# Altium PCB Layout.PcbDoc
Units mm, origin at the board's own origin, x right, y up, seen from the top; angles counter-clockwise.
Board outline 79.2 x 46 mm, 2 copper layers (Top Layer, Bottom Layer); 50 components, 65 nets, 209 pads, 9 vias.
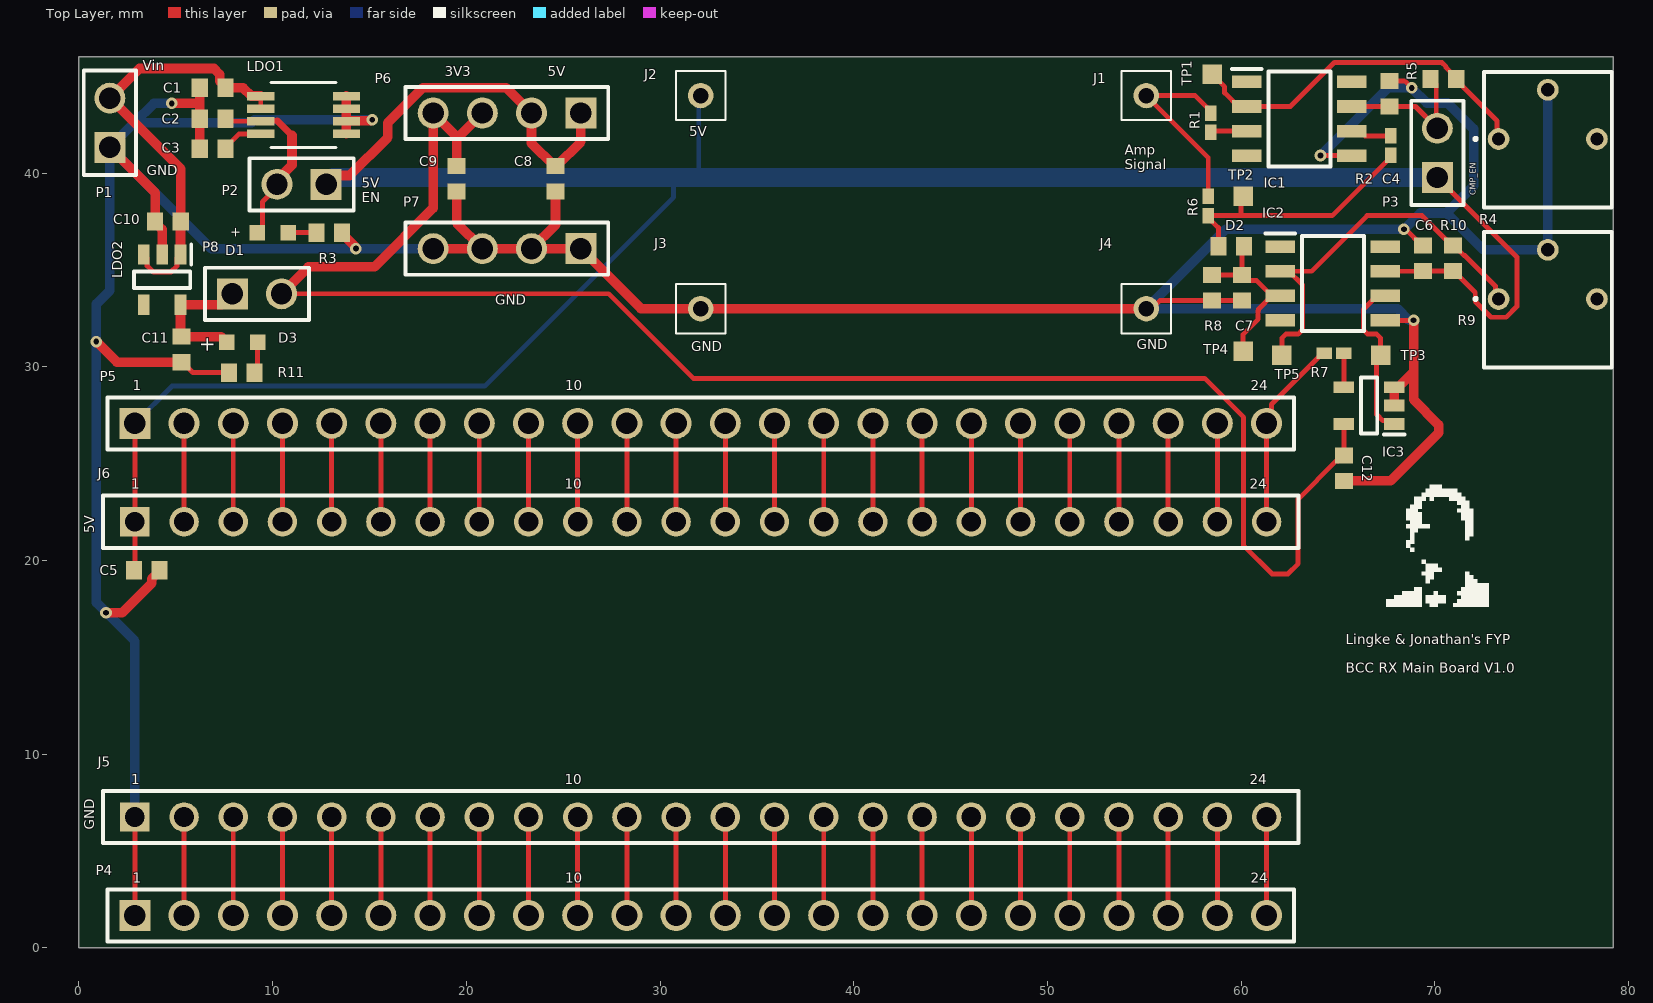
[diagram p0: Top Layer view]
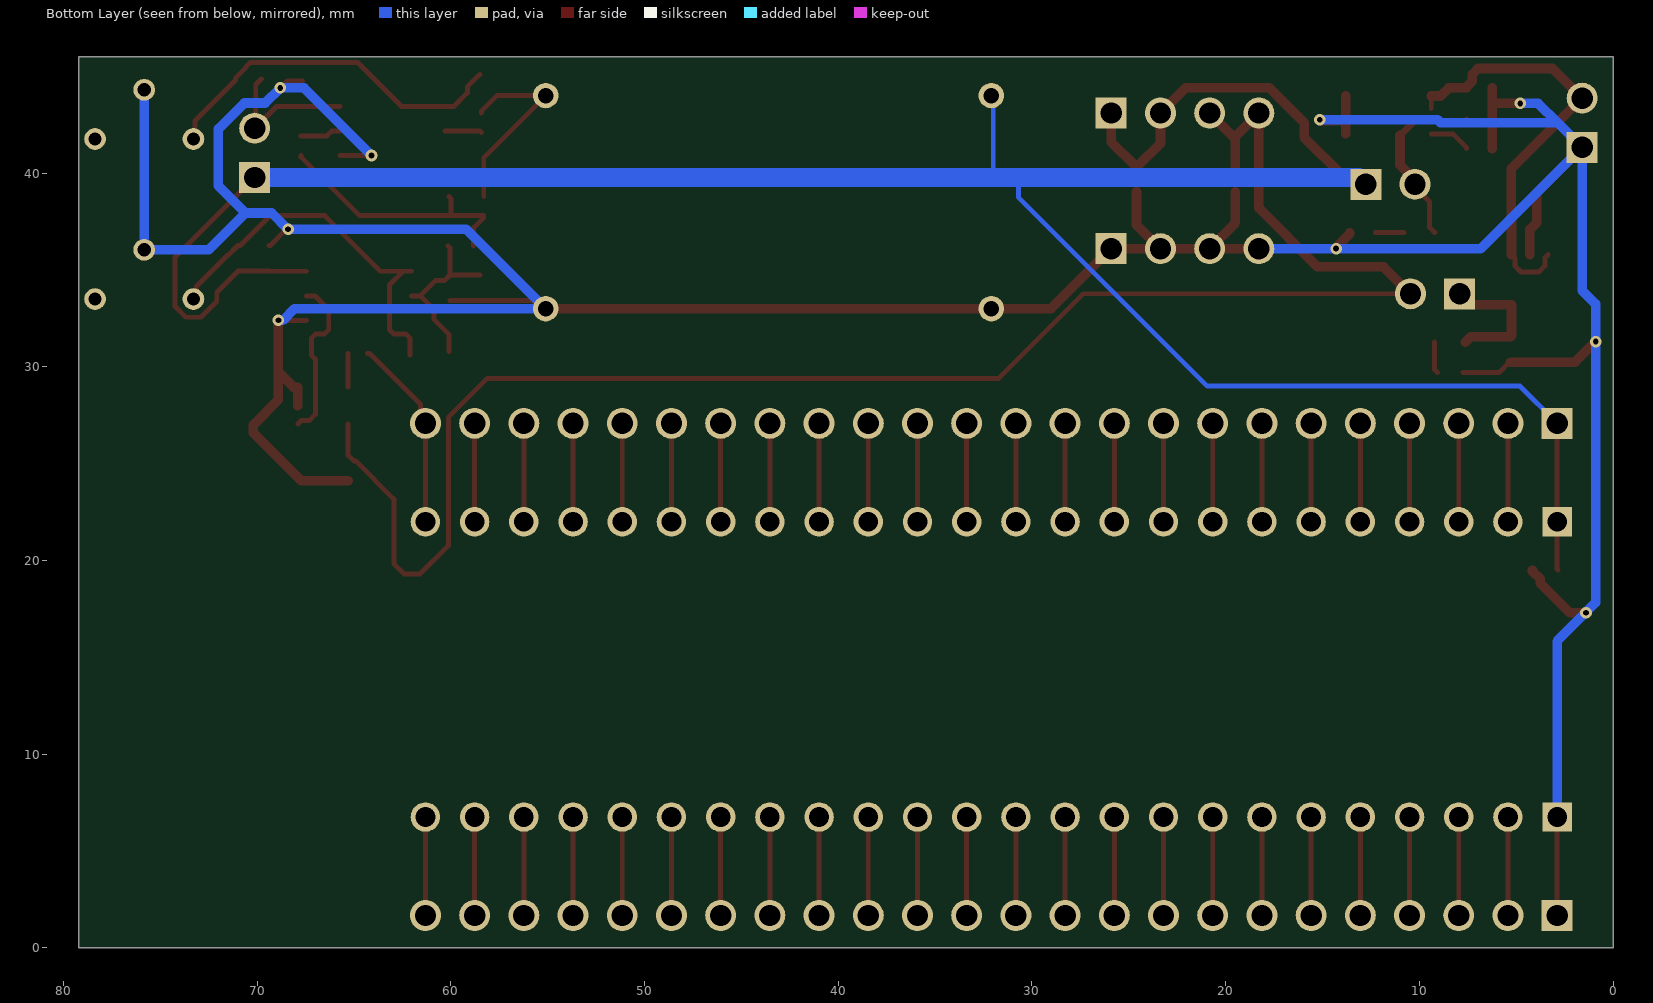
[diagram p1: Bottom Layer view, seen from below]
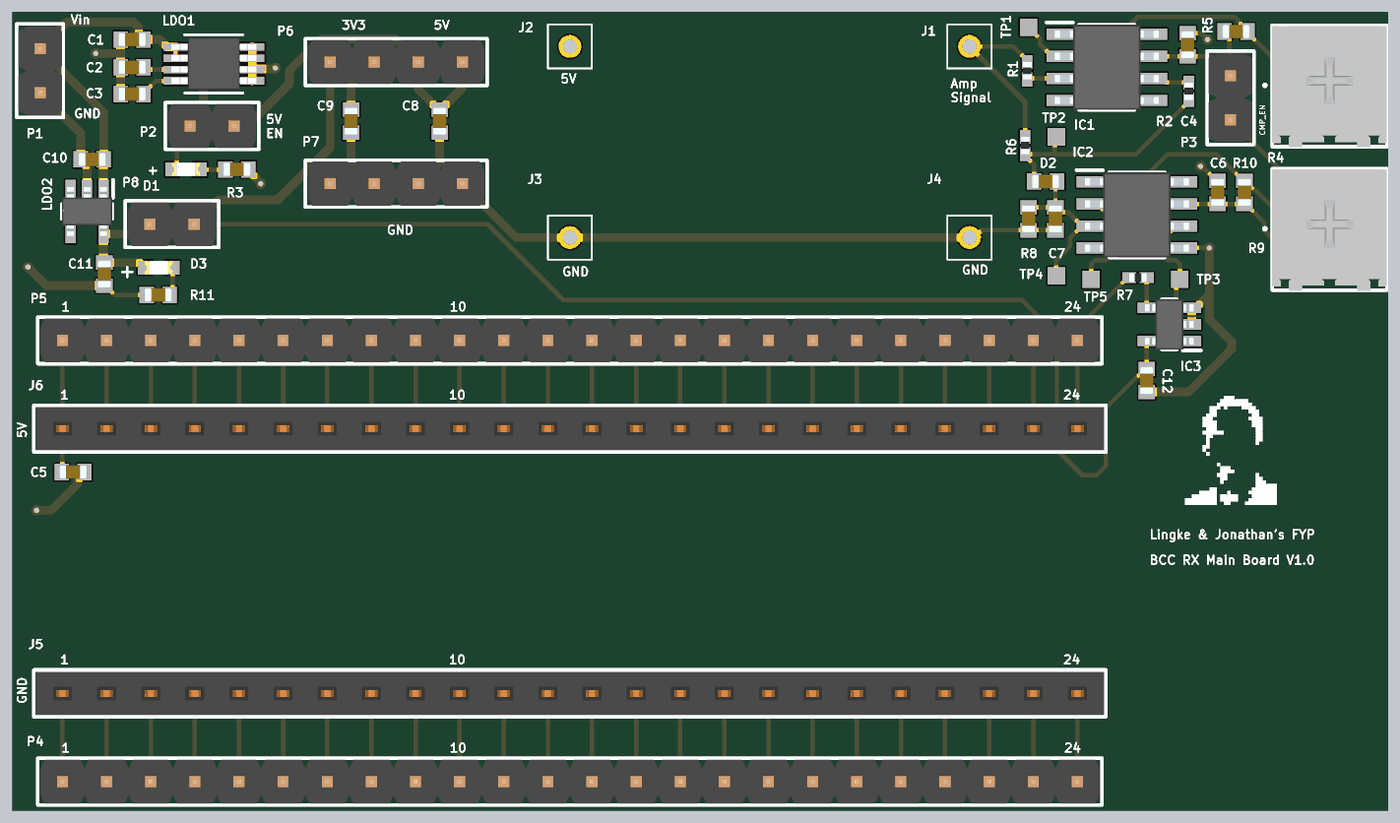
[diagram p2: 3D render of the assembled board from above, using the file's embedded part models]

## Layer stack, top to bottom
Top Solder: solder mask 0.0102, Solder Resist, Dk 3.5
Top Layer: signal copper 0.0356
Dielectric 1: dielectric 0.32, FR-4, Dk 4.8
Bottom Layer: signal copper 0.0356
Bottom Solder: solder mask 0.0102, Solder Resist, Dk 3.5

## Board outline
0,46 79.2,46 79.2,0 0,0

## Design rules (kind name [scope] priority, off if disabled: settings)
Clearance [All] p1: gap=0.254 ignorepadtopadclearanceinfootprint=TRUE
HoleToHoleClearance [All] p1: gap=0.1 allowstackedmicrovias=TRUE
MinimumSolderMaskSliver [All] p1: minsoldermaskwidth=0.1
PolygonConnect [All] p1: connectstyle=Direct reliefconductorwidth=0.254 reliefentries=4 polygonreliefangle="90 Angle" airgapwidth=0.254
RoutingVias [All] p1: holewidth=0.711 width=1.27 viastyle="Through Hole" minholewidth=0.3 minwidth=0.6 maxholewidth=0.711 maxwidth=1.27
SilkToSilkClearance [All] p1: silktosilkclearance=0.1
SilkToSolderMaskClearance [IsPad] p1: minsilkscreentomaskgap=0.1 clearancetoexposedcopper=TRUE
SolderMaskExpansion [All] p1: expansion=0.102 istentingtop=FALSE
Width GND [InNet('GND')] p1: maxlimit=1 minlimit=0.254 preferedwidth=0.5
Width [All] p2: maxlimit=2 minlimit=0.254 preferedwidth=0.254
26 further rules are at their usual default settings.

## Components (designator, comment, footprint, x,y, rotation, side; value= is the part's Value field where it differs from the comment)
C1 "1uF" 0603 6.9,44.4 r0 top
C2 "4.7uF" 0603 6.9,42.8 r0 top
C3 "470pF" 0603 6.9,41.256 r0 top
C4 "0.1uF" 0603 67.653,44.1 r270 top
C5 "0.1uF" 0603 3.5,19.5 r180 top
C6 "0.1uF" 0603 69.383,35.6 r270 top
C7 "Capacitor" 0603 60.044,34.077 r90 top
C8 "0.1uF" 0603 24.6,39.7 r90 top
C9 "0.1uF" 0603 19.5,39.7 r90 top
C10 "1uF" 0603 4.6,37.499 r0 top
C11 "1uF" 0603 5.3,30.896 r90 top
C12 "0.1uF" 0603 65.3,24.771 r90 top
D1 "Super Red, 1.9V" WL-SMCW_0603_H=0.7mm 10,36.924 r180 top
D2 "Diode" 0603 59.479,36.226 r0 top
D3 "Super Red, 1.9V" WL-SMCW_0603_H=0.7mm 8.426,31.271 r180 top
IC1 "LTC6268IS8#PBF" SOIC127P599X175-8N 63.003,42.8 r0 top
IC2 "LTC6268IS8#PBF" SOIC127P599X175-8N 64.734,34.3 r0 top
IC3 "SN74LV1T32DBVRG4" SOT-23-5 66.6,28 r180 top
J1 "SSA-101-S-T" SSA-101-S-X 55.1,44 r0 top
J2 "SSA-101-S-T" SSA-101-S-X 32.1,44 r0 top
J3 "SSA-101-S-T" SSA-101-S-X 32.1,33 r0 top
J4 "SSA-101-S-T" SSA-101-S-X 55.1,33 r0 top
J5 "61302411821" 61302411821 32.1,6.76 r0 top
J6 "61302411821" 61302411821 32.1,22 r0 top
LDO1 "MIC5219-5.0YMM-TR" MSOP-8_MS 11.6,43 r0 top
LDO2 "MIC5317-3.3YM5-TR" SOT-23-5 4.3,34.5 r270 top
P1 "61300211121" 61300211121 1.6,42.6 r90 top
P2 "61300211121" 61300211121 11.5,39.423 r180 top
P3 "61300211121" 61300211121 70.122,41.045 r90 top
P4 "61302411121" 61302411121 32.1,1.68 r0 top
P5 "61302411121" 61302411121 32.1,27.08 r0 top
P6 "61300411121" 61300411121 22.1,43.1 r180 top
P7 "61300411121" 61300411121 22.1,36.1 r180 top
P8 "61300211121" 61300211121 9.194,33.77 r0 top
R1 "0R" 0402 58.424,42.6 r90 top
R2 "0R" 0402 67.723,41.421 r90 top
R3 "1K" 0603 12.929,36.924 r0 top
R4 "3362P-1-303LF" 3362P_1 75.825,38.23 r0 top
R5 "10K" 0603 70.442,44.859 r180 top
R6 "0R" 0402 58.3,38.3 r90 top
R7 "0R" 0402 64.8,30.694 r0 top
R8 "Resistor 0603" 0603 58.5,34.077 r90 top
R9 "3362P-1-303LF" 3362P_1 75.825,29.97 r0 top
R10 "10K" 0603 70.927,35.6 r270 top
R11 "1K" 0603 8.4,29.696 r180 top
TP1 "TP" "Test Point" 58.5,45.1 r0 top
TP2 "TP" "Test Point" 60.1,38.8 r0 top
TP3 "TP" "Test Point" 67.2,30.6 r0 top
TP4 "TP" "Test Point" 60.1,30.8 r0 top
TP5 "TP" "Test Point" 62.1,30.6 r0 top

## Footprints (in the part's own frame and the unit in brackets; to place one, negate y for a bottom-side part, rotate by r counter-clockwise, add the part's x,y. Pads: shape width x height; smd on the part's side, far side on the other; paste and mask are expansions set on the pad)
0402 [mm]
  rect 0.8x0.6 smd: 1(-0.5,0) 2(0.5,0)
  body extent -0.5,-0.25 0.5,0.25, height 0.35
0603 [mm]
  rect 0.83x0.94 smd: 1(-0.66,0) 2(0.66,0)
  body extent -0.8,-0.4 0.8,0.4, height 0.9
3362P_1 [mm]
  round 1.12 hole 0.69: 1(-2.54,3.53) 2(0,6.07) 3(2.54,3.53)
  silkscreen extent -3.78,0 3.3,6.99, body extent -3.3,-0.04 3.3,6.95, height 4.75
61300211121 [mm] "Pin Header, pitch 2.54 mm, THT, Vertical, single row, 2p"
  rect 1.6x1.6 hole 1.1: 1(-1.27,0)
  round 1.6 hole 1.1: 2(1.27,0)
  silkscreen extent -2.69,-1.35 2.69,1.35, body extent -2.54,-1.27 2.54,1.27, height 8.57
61300411121 [mm] "Pin Header, pitch 2.54 mm, THT, Vertical, single row, 4p"
  rect 1.6x1.6 hole 1.1: 1(-3.81,0)
  round 1.6 hole 1.1: 2(-1.27,0) 3(1.27,0) 4(3.81,0)
  silkscreen extent -5.23,-1.35 5.23,1.35, body extent -5.08,-1.27 5.08,1.27, height 8.57
61302411121 [mm] "Pin Header, pitch 2.54 mm, THT, Vertical, single row, 24p"
  rect 1.6x1.6 hole 1.1: 1(-29.21,0)
  round 1.6 hole 1.1: 2(-26.67,0) 3(-24.13,0) 4(-21.59,0) 5(-19.05,0) 6(-16.51,0) 7(-13.97,0) 8(-11.43,0) 9(-8.89,0) 10(-6.35,0) 11(-3.81,0) 12(-1.27,0) 13(1.27,0) 14(3.81,0) 15(6.35,0) 16(8.89,0) 17(11.43,0) 18(13.97,0) 19(16.51,0) 20(19.05,0) 21(21.59,0) 22(24.13,0) 23(26.67,0) 24(29.21,0)
  silkscreen extent -30.63,-1.35 30.63,1.35, body extent -30.48,-1.27 30.48,1.27, height 8.57
61302411821 [mm] "Socket Header, Pitch 2.54 mm, THT, Vertical, single row, 24p"
  rect 1.52x1.52 hole 1.02: 1(-29.21,0)
  round 1.52 hole 1.02: 2(-26.67,0) 3(-24.13,0) 4(-21.59,0) 5(-19.05,0) 6(-16.51,0) 7(-13.97,0) 8(-11.43,0) 9(-8.89,0) 10(-6.35,0) 11(-3.81,0) 12(-1.27,0) 13(1.27,0) 14(3.81,0) 15(6.35,0) 16(8.89,0) 17(11.43,0) 18(13.97,0) 19(16.51,0) 20(19.05,0) 21(21.59,0) 22(24.13,0) 23(26.67,0) 24(29.21,0)
  silkscreen extent -30.86,-1.35 30.86,1.35, body extent -30.73,-1.25 30.73,1.25, height 8.55
MSOP-8_MS [mil]
  rect 55x17 smd mask+4.53: 1(-87,38.39) 2(-87,12.8) 3(-87,-12.8) 4(-87,-38.39) 5(87,-38.39) 6(87,-12.8) 7(87,12.8) 8(87,38.39)
  silkscreen extent -66,-66 66,66, body extent -96,-59 96,59, height 43
SOIC127P599X175-8N [mm]
  rect 1.526x0.65 smd: 1(-2.712,1.905) 2(-2.712,0.635) 3(-2.712,-0.635) 4(-2.712,-1.905) 5(2.712,-1.905) 6(2.712,-0.635) 7(2.712,0.635) 8(2.712,1.905)
  silkscreen extent -3.47,-2.45 1.6,2.58, body extent -3,-2.45 3,2.45, height 1.75
SOT-23-5 [mm]
  rect 1.05x0.6 smd: 1(-1.3,0.95) 2(-1.3,0) 3(-1.3,-0.95) 4(1.3,-0.95) 5(1.3,0.95)
  silkscreen extent -1.83,-1.45 0.43,1.5, body extent -1.4,-1.45 1.4,1.45, height 1
SSA-101-S-X [mm]
  round 1.31 hole 0.81: 1(0,0)
  silkscreen extent -1.27,-1.27 1.27,1.27
"Test Point" [mm]
  rect 1x1 smd: 1(0,0)
WL-SMCW_0603_H=0.7mm [mm] "SMD Mono-color Chip LED, body 1.6x0.8mm"
  rect 0.8x0.8 smd: 1(-0.8,0) 2(0.8,0)
  body extent -0.8,-0.4 0.8,0.4, height 0.7

## Part data
C1 C2 C3 C4 C5 C6 C8 C9 C10 C11 C12: library part Capacitor, "Capacitor"
D1 D3: library part 150060SS75000, "WL-SMCW SMT Mono-color Chip LED Waterclear, size 0603, Super Red, 1.9V, 140deg", Emitting Color="Super Red", Forward Voltage typ.=1.9V, Operating Temperature="-40 to +85degC", Chip Technology=AlInGaP, ComponentLink1Description=Manufacturer, ComponentLink1URL=http://www.we-online.de, ComponentLink2Description=Datasheet, ComponentLink2URL=https://www.we-online.com/catalog/datasheet/150060SS75000.pdf, Dominant Wavelength typ.=630nm, Luminous Intensity typ.=60mcd, Mounting Technology=SMT, Packaging="Tape and Reel", Part Number=150060SS75000, Peak Wavelength typ.=645nm, Published Date="December 2019", Publisher="Wurth Elektronik", Size=0603, Viewing Angle=140deg
IC1 IC2: "Integrated Circuit", Manufacturer_Name="Linear Technology", Mouser2 Part Number=584-LTC6268IS8#PBF, Datasheet Link=https://componentsearchengine.com//LTC6268IS8#PBF.pdf, Height=1.752mm, Manufacturer_Part_Number=LTC6268IS8#PBF, Mouser2 Price/Stock=https://www.mouser.com/Search/Refine.aspx?Keyword=584-LTC6268IS8%23PBF
IC3: Supplier Part Number 1=595-SN74LV1T32DBVRG4, Supplier 1=Mouser
J1 J2 J3 J4: "Connector", Manufacturer_Name=SAMTEC, Datasheet Link=http://suddendocs.samtec.com/prints/ssas-mkt.pdf, Manufacturer_Part_Number=SSA-101-S-T
J5 J6: "WR-PHD Socket Header, THT, pitch 2.54mm, Single Row, Vertical, 24p", Contact Resistance=20mOhm, Manufacturer="Wurth Elektronik", Operating Temperature="-40 to +125degC", Rated Current=3A, Withstanding Voltage=500VAC, Working Voltage=250VAC, ComponentLink1Description=Manufacturer, ComponentLink1URL=http://www.we-online.de, ComponentLink2Description=Datasheet, ComponentLink2URL=https://www.we-online.com/catalog/datasheet/61302411821.pdf, Gender="Socket Header", Manufacturer Part Number=61302411821, Mounting Technology=THT, Orientation=Vertical, Packaging=Tray, Pin Number=24, Pitch=2.54mm, Published Date="May 2020", Row Number=Single
LDO2: "Power Supply", Manufacturer_Name=Microchip, Mouser2 Part Number=998-MIC5317-3.3YM5TR, Datasheet Link=https://componentsearchengine.com//MIC5317-3.3YM5-TR.pdf, Height=1mm, Manufacturer_Part_Number=MIC5317-3.3YM5-TR, Mouser2 Price/Stock=https://www.mouser.com/Search/Refine.aspx?Keyword=998-MIC5317-3.3YM5TR
P1 P2 P3 P8: "WR-PHD Pin Header, THT, pitch 2.54mm, Single Row, Vertical, 2p", Contact Resistance=20mOhm, Manufacturer="Wurth Elektronik", Operating Temperature="-40 to +105degC", Rated Current=3A, Withstanding Voltage=500VAC, Working Voltage=250VAC, ComponentLink1Description=Manufacturer, ComponentLink1URL=http://www.we-online.de, ComponentLink2Description=Datasheet, ComponentLink2URL=https://www.we-online.com/catalog/datasheet/61300211121.pdf, Gender="Pin Header", Manufacturer Part Number=61300211121, Mounting Technology=THT, Orientation=Vertical, Packaging=Bag, Pin Number=2, Pitch=2.54mm, Published Date="May 2020", Row Number=Single
P4 P5: "WR-PHD Pin Header, THT, pitch 2.54mm, Single Row, Vertical, 24p", Contact Resistance=20mOhm, Manufacturer="Wurth Elektronik", Operating Temperature="-40 to +105degC", Rated Current=3A, Withstanding Voltage=500VAC, Working Voltage=250VAC, ComponentLink1Description=Manufacturer, ComponentLink1URL=http://www.we-online.de, ComponentLink2Description=Datasheet, ComponentLink2URL=https://www.we-online.com/catalog/datasheet/61302411121.pdf, Gender="Pin Header", Manufacturer Part Number=61302411121, Mounting Technology=THT, Orientation=Vertical, Packaging=Bag, Pin Number=24, Pitch=2.54mm, Published Date="May 2020", Row Number=Single
P6 P7: "WR-PHD Pin Header, THT, pitch 2.54mm, Single Row, Vertical, 4p", Contact Resistance=20mOhm, Manufacturer="Wurth Elektronik", Operating Temperature="-40 to +105degC", Rated Current=3A, Withstanding Voltage=500VAC, Working Voltage=250VAC, ComponentLink1Description=Manufacturer, ComponentLink1URL=http://www.we-online.de, ComponentLink2Description=Datasheet, ComponentLink2URL=https://www.we-online.com/catalog/datasheet/61300411121.pdf, Gender="Pin Header", Manufacturer Part Number=61300411121, Mounting Technology=THT, Orientation=Vertical, Packaging=Bag, Pin Number=4, Pitch=2.54mm, Published Date="May 2020", Row Number=Single
R1 R2 R6 R7: library part "Resistor 0402"
R3 R5 R10 R11: library part "Resistor 0603", "Resistor"
R4 R9: "Resistor", Manufacturer_Name=Bourns, Manufacturer_Part_Number=3362P-1-303LF
R8: "Resistor"
TP1 TP2 TP3 TP4 TP5: library part "Test Point", "Test Point 1mm by 1mm"

## Via types
v1: diameter 0.6, hole 0.3, Top Layer to Bottom Layer, 9 vias

## Nets (pads, with @x,y where several pads share a name; then routed paths per layer and width w, separated by ;. In a path a pad name is that pad's centre, name@x,y a point inside that pad or via, vN(x,y) a via of type N, cw(c..) or ccw(c..) an arc to the next point about the centre after c; other vN are vias at no path point)
3V3: C9.2 C12.2 IC3.5 P6.3 P6.4 P8.2 | length 90.5
  Top Layer w0.254: P8.2 27.348,33.77 31.718,29.4 58.12,29.4 60.129,27.391 60.129,20.771 61.595,19.305 62.405,19.305 62.939,19.839 62.939,23.173 64.908,25.143 65.012,25.143 C12.2 IC3.5
  Top Layer w0.5: P8.2 11.856,35.162 15.262,35.162 18.29,38.19 P6.4 19.5,41.89 19.5,41.77 ; C9.2 19.5,41.77 ; P6.3 19.5,41.77
5V: C5.2 C6.2 C8.2 IC2.7 J2.1 J6.1 P2.1 P3.1 P5.1 P6.1 P6.2 R10.2 | length 139.9
  Top Layer w0.254: C5.2 2.89,19.55 J6.1 P5.1 ; IC2.7 69.378,34.935 C6.2 R10.2 70.982,34.94 72.083,33.839 72.083,33.372 72.895,32.559 73.675,32.559 74.226,33.11 74.226,35.671 P3.1
  Top Layer w0.5: P2.1 13.224,39.877 13.977,39.877 15.946,41.846 15.946,42.6 17.75,44.404 22.066,44.404 P6.2 23.37,41.535 24.545,40.36 C8.2 24.655,40.36 25.91,41.615 P6.1
  Bottom Layer w0.254: P5.1 4.81,29 20.949,29 30.7,38.751 30.7,39.775 ; 32,39.775 32,43.9 J2.1
  Bottom Layer w0.5: P2.1 P2.1@13.122,39.775
  Bottom Layer w1: P2.1@13.122,39.775 30.7,39.775 32,39.775 P3.1
AFE_output: IC2.6 IC3.1 TP3.1 | length 8.7
  Top Layer w0.254: IC2.6 67.008,33.665 66.302,32.959 66.302,31.912 66.525,31.689 66.992,31.689 67.2,31.481 TP3.1 66.994,30.394 66.994,27.542 67.313,27.223 67.727,27.223 IC3.1
Amp_Sig: J1.1 R1.2 R6.2 | length 10.3
  Top Layer w0.254: R6.2 58.3,40.8 J1.1 57.624,44 58.424,43.2 R1.2
GND: C1.1 C2.1 C3.1 C4.1 C5.1 C6.1 C7.1 C8.1 C9.1 C10.1 C11.1 C12.1 IC1.5 IC2.5 IC3.2 IC3.3 J3.1 J4.1 J5.1 LDO1.5 LDO1.6 LDO1.7 LDO1.8 LDO2.2 P1.1 P4.1 P7.1 P7.2 P7.3 P7.4 R3.2 R4.2 R8.1 R9.2 R11.2 | length 234.5
  Top Layer w0.254: P4.1 J5.1 ; C11.1 5.355,30.236 5.894,29.696 R11.2 ; J4.1 55.386,33 55.802,33.416 R8.1 C7.1 ; v1(64.091,40.909) 64.1,40.9 65.71,40.9 IC1.5 ; IC2.5 67.451,32.4 v1(68.9,32.4) ; C4.1 68.44,44.76 v1(68.8,44.4) ; v1(68.4,37.1) 68.488,37.1 69.328,36.26 C6.1
  Top Layer w0.5: v1(0.9,31.3) 1.964,30.236 C11.1 ; v1(1.4,17.3) 2.238,17.3 3.759,18.821 3.759,19.044 4.16,19.445 C5.1 ; P1.1 3.94,38.99 C10.1 3.94,37.444 4.3,37.084 LDO2.2 ; v1(4.8,43.6) 6.24,43.6 ; C3.1 C2.1 6.24,43.6 ; C1.1 6.24,43.6 ; R3.2 13.589,36.869 14.281,36.177 14.281,36.119 v1(14.3,36.1) ; LDO1.5 LDO1.6 ; LDO1.8 LDO1.7 LDO1.6 ; v1(15.142,42.758) 15.115,42.758 15.066,42.709 13.844,42.709 LDO1.6 ; P7.4 P7.3 ; C9.1 19.5,37.43 P7.3 ; C8.1 24.6,37.33 P7.2 ; J4.1 J3.1 29.01,33 P7.1 P7.2 ; C12.1 67.711,24.111 70.193,26.593 70.193,27.007 68.9,28.3 68.9,29.725 ; IC3.2 IC3.3 68.125,28.95 68.9,29.725 ; v1(68.9,32.4) 68.9,29.725 ; P7.3 P7.2
  Bottom Layer w0.5: J5.1 2.89,15.84 0.9,17.83 0.9,33.24 1.6,33.94 P1.1 ; v1(4.8,43.6) 3.87,43.6 2.87,42.6 ; v1(15.142,42.758) 9.071,42.758 8.913,42.6 2.87,42.6 ; P7.4 v1(14.3,36.1) 6.83,36.1 P1.1 ; v1(64.091,40.909) 67.581,44.4 v1(68.8,44.4) 69.581,43.619 70.662,43.619 72,42.281 72,39.34 70.602,37.943 ; v1(68.9,32.4) 68.675,32.4 68.075,33 J4.1 59.2,37.1 v1(68.4,37.1) 69.243,37.943 70.602,37.943 ; R4.2 R9.2 72.505,36.04 70.602,37.943 ; P1.1 2.87,42.6
NetC2_2: C2.2 D1.2 LDO1.3 P2.2 | length 9.6
  Top Layer w0.254: C2.2 7.685,42.675 LDO1.3 ; D1.2 9.473,37.197 9.473,38.51 P2.2@10.23,39.267 ; 10.143,42.705 10.238,42.705
  Top Layer w0.3: LDO1.3 9.42,42.705 10.143,42.705 ; P2.2@10.23,39.267 P2.2 P2.2@10.23,39.651
  Top Layer w0.35: 10.238,42.705 11,41.943
  Top Layer w0.5: P2.2@10.23,39.651 11,40.421 11,41.943
NetC3_2: C3.2 LDO1.4 | length 2.2
  Top Layer w0.254: C3.2 7.56,41.311 8.274,42.025 LDO1.4
NetC4_2: C4.2 IC1.7 P3.2 R5.2 | length 7.5
  Top Layer w0.254: IC1.7 67.648,43.435 C4.2 68.997,43.44 P3.2@70.07,42.367 ; R5.2 70.07,44.571 P3.2@70.07,42.367 ; P3.2 P3.2@70.07,42.367
NetC7_2: C7.2 D2.2 IC2.3 R8.2 TP4.1 | length 9
  Top Layer w0.254: R8.2 C7.2 ; TP4.1 60.1,31.681 60.877,32.458 60.877,32.878 60.895,32.896 60.895,32.977 IC2.3@61.583,33.665 ; D2.2 60.044,36.131 C7.2 ; IC2.3 IC2.3@61.583,33.665 ; C7.2 60.332,34.449 60.8,34.449 IC2.3@61.583,33.665
NetC11_2: C11.2 D3.2 LDO2.5 P8.1 | length 7
  Top Layer w0.5: D3.2 7.341,31.556 C11.2 5.25,31.606 LDO2.5 7.354,33.2 P8.1
NetD1_1: D1.1 R3.1 | length 1.5
  Top Layer w0.254: D1.1 R3.1
NetD2_1: D2.1 R2.1 R6.1 TP2.1 | length 13.6
  Top Layer w0.254: D2.1 58.819,37.181 58.3,37.7 R6.1 60,37.8 ; TP2.1 60,38.7 60,37.8 ; R2.1 67.723,40.821 64.702,37.8 60,37.8
NetD3_1: D3.1 R11.1 | length 1.6
  Top Layer w0.254: R11.1 9.226,29.863 D3.1
NetIC1_2: IC1.2 R4.1 R5.1 TP1.1 | length 18.8
  Top Layer w0.254: TP1.1 59.147,44.453 59.147,44.141 59.853,43.435 IC1.2 62.535,43.435 64.81,45.71 70.355,45.71 70.578,45.487 70.578,45.438 71.102,44.914 R5.1 71.102,44.804 73.205,42.701 73.205,41.84 R4.1
NetIC1_3: IC1.3 R1.1 | length 1.9
  Top Layer w0.254: R1.1 58.489,42.165 IC1.3
NetIC1_6: IC1.6 R2.2 | length 2.1
  Top Layer w0.254: IC1.6 66.153,42.165 66.398,41.921 R2.2
NetIC2_2: IC2.2 R9.1 R10.1 TP5.1 | length 20
  Top Layer w0.254: IC2.2 IC2.2@62.459,34.935 ; TP5.1 62.1,31.481 62.308,31.689 62.942,31.689 63.165,31.912 63.165,34.229 IC2.2@62.459,34.935 ; R9.1 73.12,33.666 73.12,34.171 71.555,35.736 71.506,35.736 70.982,36.26 R10.1 70.872,36.26 69.332,37.8 66.5,37.8 63.635,34.935 IC2.2@62.459,34.935
NetIC3_4: IC3.4 R7.2 | length 1.7
  Top Layer w0.254: IC3.4 R7.2
NetJ5_2: J5.2 P4.2 | length 5.1
  Top Layer w0.254: P4.2 J5.2
NetJ5_3: J5.3 P4.3 | length 5.1
  Top Layer w0.254: P4.3 J5.3
NetJ5_4: J5.4 P4.4 | length 5.1
  Top Layer w0.254: P4.4 J5.4
NetJ5_5: J5.5 P4.5 | length 5.1
  Top Layer w0.254: P4.5 J5.5
NetJ5_6: J5.6 P4.6 | length 5.1
  Top Layer w0.254: P4.6 J5.6
NetJ5_7: J5.7 P4.7 | length 5.1
  Top Layer w0.254: P4.7 J5.7
NetJ5_8: J5.8 P4.8 | length 5.1
  Top Layer w0.254: P4.8 J5.8
NetJ5_9: J5.9 P4.9 | length 5.1
  Top Layer w0.254: P4.9 J5.9
NetJ5_10: J5.10 P4.10 | length 5.1
  Top Layer w0.254: P4.10 J5.10
NetJ5_11: J5.11 P4.11 | length 5.1
  Top Layer w0.254: P4.11 J5.11
NetJ5_12: J5.12 P4.12 | length 5.1
  Top Layer w0.254: P4.12 J5.12
NetJ5_13: J5.13 P4.13 | length 5.1
  Top Layer w0.254: P4.13 J5.13
NetJ5_14: J5.14 P4.14 | length 5.1
  Top Layer w0.254: P4.14 J5.14
NetJ5_15: J5.15 P4.15 | length 5.1
  Top Layer w0.254: P4.15 J5.15
NetJ5_16: J5.16 P4.16 | length 5.1
  Top Layer w0.254: P4.16 J5.16
NetJ5_17: J5.17 P4.17 | length 5.1
  Top Layer w0.254: P4.17 J5.17
NetJ5_18: J5.18 P4.18 | length 5.1
  Top Layer w0.254: P4.18 J5.18
NetJ5_19: J5.19 P4.19 | length 5.1
  Top Layer w0.254: P4.19 J5.19
NetJ5_20: J5.20 P4.20 | length 5.1
  Top Layer w0.254: P4.20 J5.20
NetJ5_21: J5.21 P4.21 | length 5.1
  Top Layer w0.254: P4.21 J5.21
NetJ5_22: J5.22 P4.22 | length 5.1
  Top Layer w0.254: P4.22 J5.22
NetJ5_23: J5.23 P4.23 | length 5.1
  Top Layer w0.254: P4.23 J5.23
NetJ5_24: J5.24 P4.24 | length 5.1
  Top Layer w0.254: P4.24 J5.24
NetJ6_2: J6.2 P5.2 | length 5.1
  Top Layer w0.254: J6.2 P5.2
NetJ6_3: J6.3 P5.3 | length 5.1
  Top Layer w0.254: J6.3 P5.3
NetJ6_4: J6.4 P5.4 | length 5.1
  Top Layer w0.254: J6.4 P5.4
NetJ6_5: J6.5 P5.5 | length 5.1
  Top Layer w0.254: J6.5 P5.5
NetJ6_6: J6.6 P5.6 | length 5.1
  Top Layer w0.254: J6.6 P5.6
NetJ6_7: J6.7 P5.7 | length 5.1
  Top Layer w0.254: J6.7 P5.7
NetJ6_8: J6.8 P5.8 | length 5.1
  Top Layer w0.254: J6.8 P5.8
NetJ6_9: J6.9 P5.9 | length 5.1
  Top Layer w0.254: J6.9 P5.9
NetJ6_10: J6.10 P5.10 | length 5.1
  Top Layer w0.254: J6.10 P5.10
NetJ6_11: J6.11 P5.11 | length 5.1
  Top Layer w0.254: J6.11 P5.11
NetJ6_12: J6.12 P5.12 | length 5.1
  Top Layer w0.254: J6.12 P5.12
NetJ6_13: J6.13 P5.13 | length 5.1
  Top Layer w0.254: J6.13 P5.13
NetJ6_14: J6.14 P5.14 | length 5.1
  Top Layer w0.254: J6.14 P5.14
NetJ6_15: J6.15 P5.15 | length 5.1
  Top Layer w0.254: J6.15 P5.15
NetJ6_16: J6.16 P5.16 | length 5.1
  Top Layer w0.254: J6.16 P5.16
NetJ6_17: J6.17 P5.17 | length 5.1
  Top Layer w0.254: J6.17 P5.17
NetJ6_18: J6.18 P5.18 | length 5.1
  Top Layer w0.254: J6.18 P5.18
NetJ6_19: J6.19 P5.19 | length 5.1
  Top Layer w0.254: J6.19 P5.19
NetJ6_20: J6.20 P5.20 | length 5.1
  Top Layer w0.254: J6.20 P5.20
NetJ6_21: J6.21 P5.21 | length 5.1
  Top Layer w0.254: J6.21 P5.21
NetJ6_22: J6.22 P5.22 | length 5.1
  Top Layer w0.254: J6.22 P5.22
NetJ6_23: J6.23 P5.23 | length 5.1
  Top Layer w0.254: J6.23 P5.23
PIO1: J6.24 P5.24 R7.1 | length 10
  Top Layer w0.254: J6.24 P5.24 61.568,27.338 61.568,28.061 64.2,30.694 R7.1
Vin: C1.2 C10.2 LDO1.1 LDO1.2 LDO2.1 LDO2.3 P1.2 | length 22.6
  Top Layer w0.254: LDO2.3 3.523,35.627 3.523,35.213 3.842,34.894 4.758,34.894 5.077,35.213 5.077,35.627 LDO2.1 ; C10.2@5.25,37.489 C10.2 ; LDO1.2 LDO1.1
  Top Layer w0.5: LDO2.1 C10.2@5.25,37.489 ; C10.2 5.26,40.21 P1.2 3.13,45.4 6.974,45.4 7.272,45.102 7.272,44.743 7.56,44.455 C1.2 8.483,44.4 8.908,43.975 LDO1.1
pads on no net: IC1.1 IC1.4 IC1.8 IC2.1 IC2.4 IC2.8 LDO2.4 R4.3 R9.3

## Silkscreen, mask and mechanical layers (free items; w line width, h text height)
Top Overlay:
  drawing of 5 lines, arcs and shapes, not listed
  text "Vin" at 3.3,45.3 h0.5
  text "3V3" at 18.9,45 h0.5
  text "5V" at 24.2,45 h0.5
  text "5V" at 31.5,41.9 h0.5
  text "Amp / Signal" at 54,40.2 h0.5
  text "GND" at 3.5,39.9 h0.5
  text "CMP_EN" at 72.1,38.85 h0.3 r90
  text "5V / EN" at 14.6,38.5 h0.5
  text "GND" at 21.5,33.2 h0.5
  text "GND" at 54.6,30.9 h0.5
  text "GND" at 31.6,30.8 h0.5
  text "5V" at 0.8,21.4 h0.5 r90
  text "Lingke & Jonathan's FYP" at 65.4,15.667 h0.5
  text "BCC RX Main Board V1.0" at 65.4,14.2 h0.5
  text "GND" at 0.8,6.1 h0.5 r90
Board Outline:
  the board outline again, w0.2

## Text inside footprints (layer, text, board x,y; h text height)
D1: Top Overlay "+" at 7.9,37.224 h0.5 r270
D3: Top Overlay "+" at 6.326,31.571 h0.76 r270
J5: Top Overlay "10" at 25.07,8.46 h0.5; Top Overlay "1" at 2.7,8.46 h0.5; Top Overlay "24" at 60.44,8.46 h0.5
J6: Top Overlay "10" at 25.07,23.7 h0.5; Top Overlay "1" at 2.7,23.7 h0.5; Top Overlay "24" at 60.44,23.7 h0.5
P4: Top Overlay "24" at 60.49,3.38 h0.5; Top Overlay "10" at 25.12,3.38 h0.5; Top Overlay "1" at 2.77,3.38 h0.5
P5: Top Overlay "24" at 60.49,28.78 h0.5; Top Overlay "10" at 25.12,28.78 h0.5; Top Overlay "1" at 2.77,28.78 h0.5